# Altium PCB Rev1.PcbDoc
Units mil, origin at the board's own origin, x right, y up, seen from the top; angles counter-clockwise.
Board outline 3765.13 x 1835.48 mil, 2 copper layers (Top Layer, Bottom Layer); 37 components, 36 nets, 211 pads, 76 vias.
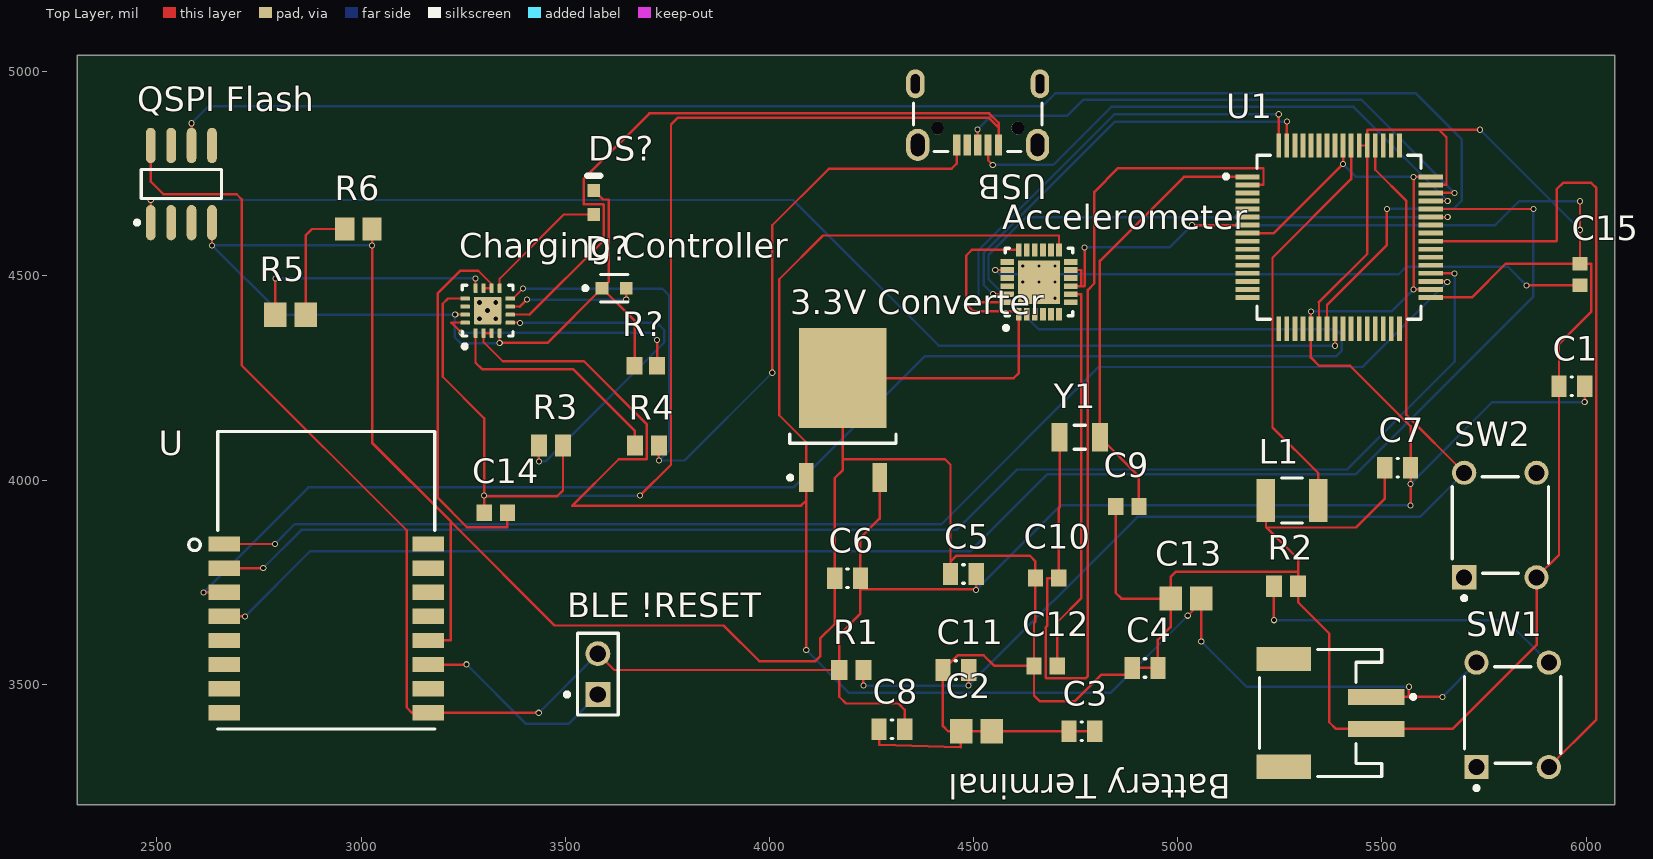
[diagram p0: Top Layer view]
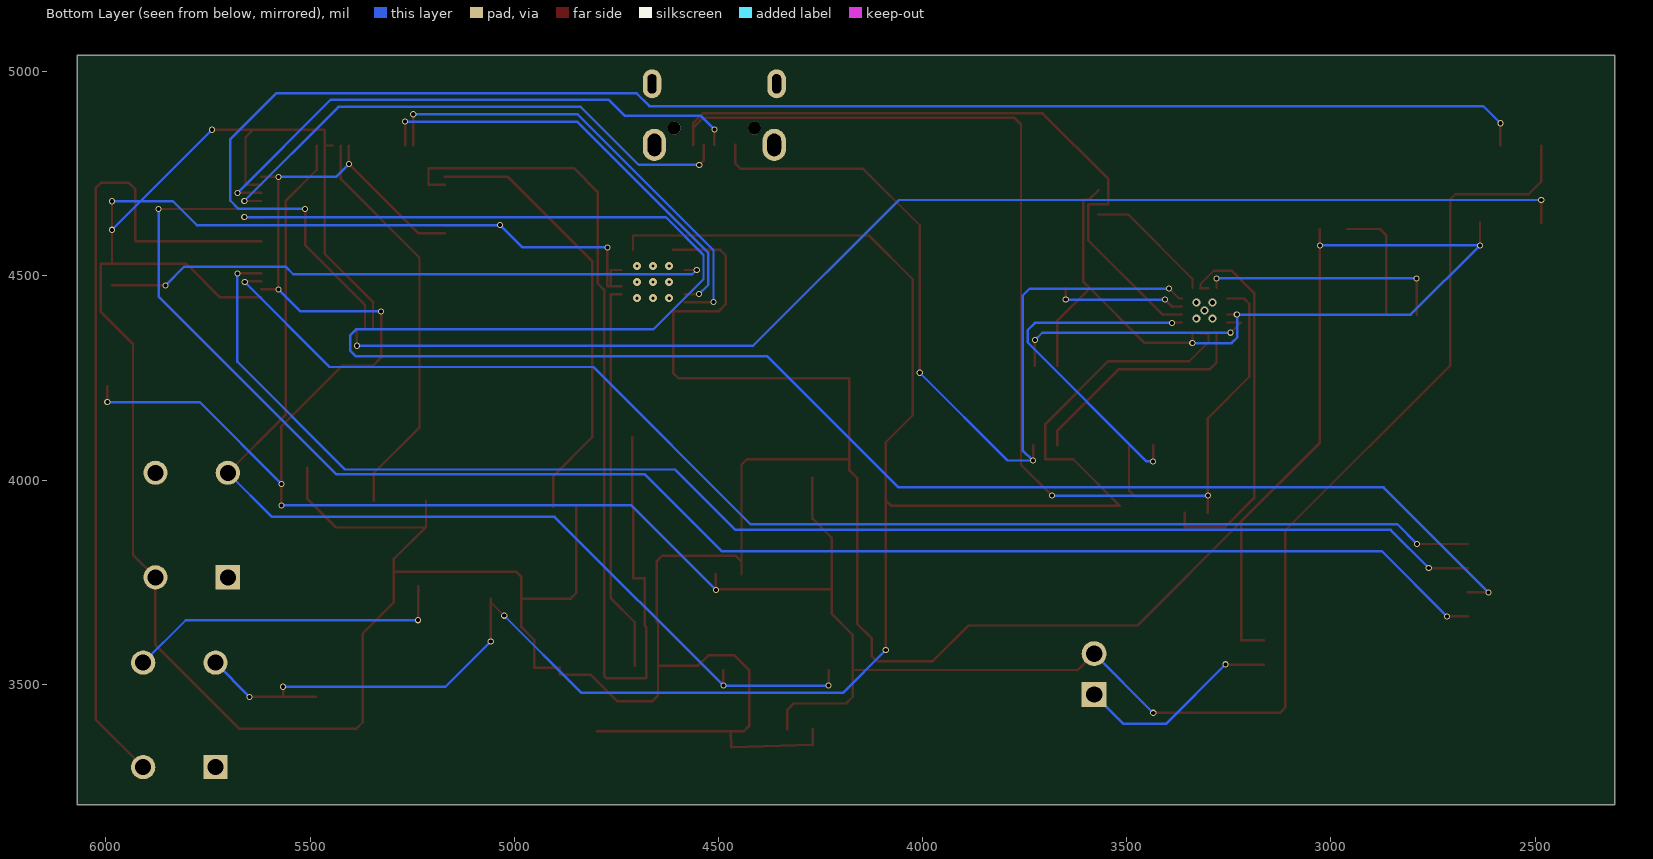
[diagram p1: Bottom Layer view, seen from below]

## Layer stack, top to bottom
Top Solder: solder mask 0.4, Solder Resist, Dk 3.5
Top Layer: signal copper 1.4
Dielectric 1: dielectric 12.6, FR-4, Dk 4.8
Bottom Layer: signal copper 1.4
Bottom Solder: solder mask 0.4, Solder Resist, Dk 3.5

## Board outline
2305,3205 6070.13,3205 6070.13,5040.48 2305,5040.48

## Design rules (kind name [scope] priority, off if disabled: settings)
Clearance [All] p1: gap=6 ignorepadtopadclearanceinfootprint=TRUE except(0: Arc-Hole Track-Hole SMDPad-Hole THPad-Hole Via-Hole Fill-Hole Poly-Hole Region-Hole Text-Hole)
PolygonConnect [All] p1: connectstyle=Relief reliefconductorwidth=10 reliefentries=4 polygonreliefangle="90 Angle" airgapwidth=10
RoomDefinition U_SdpSchemRev1 [InComponentClass('U_SdpSchemRev1')] p1: confinementstyle=ConfineIn formatcopy=TRUE lockcomponents=FALSE outline 0,0 2000,0 2000,1000 0,1000
RoomDefinition Sheet1 [InComponentClass('Sheet1')] p2: confinementstyle=ConfineIn formatcopy=TRUE lockcomponents=FALSE outline 0,0 2000,0 2000,1000 0,1000
RoutingVias [All] p1: holewidth=10 width=15 viastyle="Through Hole" minholewidth=10 minwidth=15 maxholewidth=28 maxwidth=50
SMDNeckDown [All] p1: percent=50.000
SolderMaskExpansion [All] p1: expansion=4 istentingtop=FALSE
Width [All] p1: maxlimit=6 minlimit=6 preferedwidth=6 minimp=50.000000 maximp=50.000000 favimp=50.000000
30 further rules are at their usual default settings.

## Classes and differential pairs
component class Sheet1: "BLE !RESET" "QSPI Flash" U
component class U_SdpSchemRev1: "3.3V Converter" Accelerometer "Battery Terminal" C1 C2 C3 C4 C5 C6 C7 C8 C9 C10 C11 C12 C13 C14 C15 "Charging Controller" D? DS? L1 R1 R2 R3 R4 R5 R6 R? SW1 SW2 U1 USB Y1

## Components (designator, comment, footprint, x,y, rotation, side; value= is the part's Value field where it differs from the comment)
"3.3V Converter" "KF33BDT-TR" TO-252_L 4180,4171.26 r90 top
Accelerometer "MPU6050" INSE-QFN-24_V 4660,4485 r90 top
"Battery Terminal" "S2B-PH-SM4-TB(LF)(SN)" "JST- S2B-PH-SM4-TB(LF)(SN)-2_V" 5350,3430 r270 top
"BLE !RESET" "TSW-102-07-S-S" SMTC-TSW-102-07-S-S 3580,3525 r90 top
C1 "CAP 1uF 50V 0805(2012)" CAPC0805(2012)145_L 5965,4230 r0 top value=1uF
C2 "GRM21BR61E106KA73L" CAPC2013X135X45ML10T25 4507.4,3385 r0 top
C3 "" CAPC0805(2012)145_L 4765,3385 r0 top value=1uF
C4 "CAP 1uF 50V 0805(2012)" CAPC0805(2012)145_L 4920,3540 r0 top value=1uF
C5 "" CAPC0805(2012)145_L 4475,3770 r0 top value=1uF
C6 "" CAPC0805(2012)145_L 4191.5,3760 r0 top value=1uF
C7 "" CAPC0805(2012)145_L 5538.5,4030 r0 top value=1uF
C8 "CAP 1uF 50V 0805(2012)" CAPC0805(2012)145_L 4300,3390 r0 top value=1uF
C9 "GRM1885C1H220JA01D" CAPC1608X90X35ML10T15 4876.46,3935 r0 top
C10 "GRM1885C1H220JA01D" CAPC1608X90X35ML10T15 4680,3760 r0 top
C11 "CAP 1uF 50V 0805(2012)" CAPC0805(2012)145_L 4456.5,3535 r0 top value=1uF
C12 "GRM188R71H103KA01D" CAPC1608X90X35ML10T15 4676.46,3545 r0 top
C13 "GRM21BR61E106KA73L" CAPC2013X135X45ML10T25 5020,3710 r0 top
C14 "GRM188R60J475KE19D" CAPC1608X90X35ML10T15 3330,3920 r0 top
C15 "GRM188R71H222KA01D" CAPC1608X90X35NL10T15 5985,4503.43 r90 top
"Charging Controller" "BQ24075RGTT" RGT0016C_V 3310,4415 r90 top
D? "LTST-C190GKT" FP-LTST-C190GKT-MFG 3620,4470 r0 top
DS? "HSMS-C190" AVAG-HSMX-C190_V 3570,4680 r90 top
L1 "B82422A1103K100" TDK-B82422A1103K100_V 5280,3950 r0 top
"QSPI Flash" "GD25Q16" MICT-MN-8_N 2560,4725 r90 top
R1 "ERA-6AEB103V" RESC2013X60X40LL20T25_A 4200.47,3535 r0 top
R2 "ERA6AEB331V" RESC2013X60X40LL20T25 5265,3740 r0 top
R3 "ERA6AEB2873V" RESC2013X60X40LL20T25 3465,4085 r0 top
R4 "ERA-6AEB103V" RESC2013X60X40LL20T25_A 3700,4085 r0 top
R5 "ERA6AEB472V" RESC2013X60X40ML20T25 2827.6,4405 r0 top
R6 "ERA6AEB332V" RESC2013X60X40NL20T25 2993.46,4615 r0 top
R? "ERA3AEB8451V" RESC1608X55X30ML20T20 3697.56,4280 r0 top
SW1 "PTS645SM43SMTR92LFS" ITT-PTS645S-4_V 5820,3425 r90 top
SW2 "PTS645SM43SMTR92LFS" ITT-PTS645S-4_V 5790,3890 r90 top
U "317030001" XCVR_317030001 2915,3755 r0 top
U1 "ATSAMD51J19" FP-C04-085-MFG 5395,4595 r0 top
USB "629105150521" 629105150521 4510,4935 r180 top
Y1 "ABS07-120-32.768KHZ-T" ABRA-ABS07_A_V 4760,4105 r0 top

## Footprints (in the part's own frame and the unit in brackets; to place one, negate y for a bottom-side part, rotate by r counter-clockwise, add the part's x,y. Pads: shape width x height; smd on the part's side, far side on the other; paste and mask are expansions set on the pad)
629105150521 [mm] "Micro USB 2.0 SMT Type B Horizontal 5 Contacts High Current"
  rect 0.45x1.3 smd: 1(-1.3,2.9) 2(-0.65,2.9) 3(0,2.9) 4(0.65,2.9) 5(1.3,2.9)
  round 0.8 hole 0.8 unplated: MH1(-2.5,1.85) MH2(2.5,1.85)
  oval 1.15x1.8 hole 0.55 slot 1.2 at 90 deg: Shell(-3.875,-0.9) Shell(3.875,-0.9)
  oval 1.45x2 hole 0.85 slot 1.4 at 90 deg: Shell(-3.725,2.9) Shell(3.725,2.9)
  silkscreen extent -4,0.3 4,3.3, body extent -4,-3.3 4,3.3, height 2.75
ABRA-ABS07_A_V [mm] "SMD, 2-Leads, Body 3.2x1.5mm"
  rect 1x1.8 smd: 1(-1.25,0) 2(1.25,0)
  silkscreen extent -0.35,-0.75 0.35,0.75, body extent -1.6,-0.75 1.6,0.75, height 0.9
AVAG-HSMX-C190_V [mm] "SMD, 2-Leads, Body 1.6x0.8mm, Height 0.9mm"
  rect 0.8x0.8 smd: 1(-0.75,0) 2(0.75,0)
  silkscreen extent 1.65,-0.4 1.65,0.4, body extent -0.8,-0.4 0.8,0.4, height 0.9
CAPC0805(2012)145_L [mm] "Chip Capacitor, Body 2.0x1.2mm, Height 1.45mm, IPC High Density"
  rect 0.95x1.35 smd: 1(-0.8,0) 2(0.8,0)
  silkscreen extent -0.05,-0.58 0.05,0.58, body extent -1.1,-0.72 1.1,0.72, height 1.45
CAPC1608X90X35ML10T15 [mm] "Chip Capacitor, 2-Leads, Body 1.7x0.9mm, IPC Low Density"
  rect 0.95x1.05 smd: 1(-0.725,0) 2(0.725,0)
  body extent -0.85,-0.45 0.85,0.45, height 0.9
CAPC1608X90X35NL10T15 [mm] "Chip Capacitor, 2-Leads, Body 1.7x0.9mm, IPC Medium Density"
  rect 0.85x0.95 smd: 1(-0.675,0) 2(0.675,0)
  body extent -0.85,-0.45 0.85,0.45, height 0.9
CAPC2013X135X45ML10T25 [mm] "Chip Capacitor, 2-Leads, Body 2.00x1.25mm, IPC Low Density"
  rect 1.4x1.5 smd: 1(-0.95,0) 2(0.95,0)
  body extent -1.05,-0.67 1.05,0.67, height 1.35
FP-C04-085-MFG [mm]
  rect 1.5x0.3 smd paste+0 mask+0: 1(-5.7,3.75) 2(-5.7,3.25) 3(-5.7,2.75) 4(-5.7,2.25) 5(-5.7,1.75) 6(-5.7,1.25) 7(-5.7,0.75) 8(-5.7,0.25) 9(-5.7,-0.25) 10(-5.7,-0.75) 11(-5.7,-1.25) 12(-5.7,-1.75) 13(-5.7,-2.25) 14(-5.7,-2.75) 15(-5.7,-3.25) 16(-5.7,-3.75) 33(5.7,-3.75) 34(5.7,-3.25) 35(5.7,-2.75) 36(5.7,-2.25) 37(5.7,-1.75) 38(5.7,-1.25) 39(5.7,-0.75) 40(5.7,-0.25) 41(5.7,0.25) 42(5.7,0.75) 43(5.7,1.25) 44(5.7,1.75) 45(5.7,2.25) 46(5.7,2.75) 47(5.7,3.25) 48(5.7,3.75)
  rect 0.3x1.5 smd paste+0 mask+0: 17(-3.75,-5.7) 18(-3.25,-5.7) 19(-2.75,-5.7) 20(-2.25,-5.7) 21(-1.75,-5.7) 22(-1.25,-5.7) 23(-0.75,-5.7) 24(-0.25,-5.7) 25(0.25,-5.7) 26(0.75,-5.7) 27(1.25,-5.7) 28(1.75,-5.7) 29(2.25,-5.7) 30(2.75,-5.7) 31(3.25,-5.7) 32(3.75,-5.7) 49(3.75,5.7) 50(3.25,5.7) 51(2.75,5.7) 52(2.25,5.7) 53(1.75,5.7) 54(1.25,5.7) 55(0.75,5.7) 56(0.25,5.7) 57(-0.25,5.7) 58(-0.75,5.7) 59(-1.25,5.7) 60(-1.75,5.7) 61(-2.25,5.7) 62(-2.75,5.7) 63(-3.25,5.7) 64(-3.75,5.7)
  silkscreen extent -7.15,-5.1 5.1,5.1, body extent -6.55,-6.55 6.55,6.55, height 0.25
FP-LTST-C190GKT-MFG [mm]
  rect 0.8x0.8 smd paste+0 mask+0: 1(-0.75,0) 2(0.75,0)
  silkscreen extent -1.92,-0.85 0.85,0.85, body extent -1.25,-0.55 1.25,0.55, height 0.25
INSE-QFN-24_V [mm] "QFN, 24-Leads, Body 4.00x4.00mm, Pitch 0.50mm, Thermal Pad 2.7x2.6mm"
  rect 0.8x0.35 smd: 1(-2,1.25) 2(-2,0.75) 3(-2,0.25) 4(-2,-0.25) 5(-2,-0.75) 6(-2,-1.25) 13(2,-1.25) 14(2,-0.75) 15(2,-0.25) 16(2,0.25) 17(2,0.75) 18(2,1.25)
  rect 0.35x0.85 smd: 7(-1.25,-1.975) 8(-0.75,-1.975) 9(-0.25,-1.975) 10(0.25,-1.975) 11(0.75,-1.975) 12(1.25,-1.975) 19(1.25,1.975) 20(0.75,1.975) 21(0.25,1.975) 22(-0.25,1.975) 23(-0.75,1.975) 24(-1.25,1.975)
  rect 2.7x2.6 smd: 25(0,0)
  silkscreen extent -2.97,-2.1 2.1,2.17, body extent -2,-2 2,2, height 0.95
ITT-PTS645S-4_V [mm] "TH, 4-Leads, Body 6x6mm"
  rect 1.5x1.5 hole 1: 1(-3.25,2.25)
  round 1.5 hole 1: 2(3.25,2.25) 3(-3.25,-2.25) 4(3.25,-2.25)
  silkscreen extent -4.67,-3 3,3, body extent -3,-3 3,3, height 4.4
"JST- S2B-PH-SM4-TB(LF)(SN)-2_V" [mm] "SMD, 2-Leads, Body 7.9x7.6mm, Pitch 2mm"
  rect 1x3.5 smd: 1(-1,3.45) 2(1,3.45)
  rect 1.5x3.4 smd: MP1(-3.35,-2.3) MP2(3.35,-2.3)
  silkscreen extent -3.95,-3.8 3.95,5.88, body extent -3.95,-3.8 3.95,4.8, height 5.6
MICT-MN-8_N [mm] "SOIC, 8-Leads, Body 5x4mm, Pitch 1.27mm, IPC Medium Density"
  oval 2.2x0.6 smd: 1(-2.4,1.905) 2(-2.4,0.635) 3(-2.4,-0.635) 4(-2.4,-1.905) 5(2.4,-1.905) 6(2.4,-0.635) 7(2.4,0.635) 8(2.4,1.905)
  silkscreen extent -2.52,-2.5 0.9,2.88, body extent -2,-2.5 2,2.5, height 0.1
RESC1608X55X30ML20T20 [mm] "Chip Resistor, 2-Leads, Body 1.60x0.80mm, IPC Low Density"
  rect 1x1.1 smd: 1(-0.7,0) 2(0.7,0)
  body extent -0.9,-0.5 0.9,0.5, height 0.55
RESC2013X60X40LL20T25 [mm] "Chip Resistor, 2-Leads, Body 2.00x1.25mm, IPC High Density"
  rect 1x1.35 smd: 1(-0.75,0) 2(0.75,0)
  body extent -1.1,-0.72 1.1,0.72, height 0.6
RESC2013X60X40LL20T25_A [mm] "Chip Resistor, 2-Leads, Body 2.20x1.35mm, IPC High Density"
  rect 1x1.25 smd: 1(-0.75,0) 2(0.75,0)
  body extent -1.1,-0.67 1.1,0.67, height 0.6
RESC2013X60X40ML20T25 [mm] "Chip Resistor, 2-Leads, Body 2.00x1.25mm, IPC Low Density"
  rect 1.4x1.55 smd: 1(-0.95,0) 2(0.95,0)
  body extent -1.1,-0.72 1.1,0.72, height 0.6
RESC2013X60X40NL20T25 [mm] "Chip Resistor, 2-Leads, Body 2.00x1.25mm, IPC Medium Density"
  rect 1.2x1.45 smd: 1(-0.85,0) 2(0.85,0)
  body extent -1.1,-0.72 1.1,0.72, height 0.6
RGT0016C_V [mm] "QFN, 16-Leads, Body 3x3mm, Pitch 0.5mm, Thermal Pad 1.65x1.65mm"
  rrect40% 0.6x0.25 smd: 1(-1.4,0.75) 2(-1.4,0.25) 3(-1.4,-0.25) 4(-1.4,-0.75) 9(1.4,-0.75) 10(1.4,-0.25) 11(1.4,0.25) 12(1.4,0.75)
  rrect40% 0.25x0.6 smd: 5(-0.75,-1.4) 6(-0.25,-1.4) 7(0.25,-1.4) 8(0.75,-1.4) 13(0.75,1.4) 14(0.25,1.4) 15(-0.25,1.4) 16(-0.75,1.4)
  rrect6% 1.7x1.7 smd paste-0.85: 17(0,0)
  rrect6% 1.55x1.55 on Top Paste: 17(0,0)
  silkscreen extent -2.35,-1.58 1.58,1.58, body extent -1.5,-1.5 1.5,1.5, height 1
SMTC-TSW-102-07-S-S [mm] "Header, 2-Leads, Body 5.08x2.54mm, Pitch 2.54mm"
  rect 1.55x1.55 hole 1.02: 1(-1.27,0)
  round 1.55 hole 1.02: 2(1.27,0)
  silkscreen extent -2.54,-1.27 2.54,2.04, body extent -2.54,-1.27 2.67,1.27, height 8.38
TDK-B82422A1103K100_V [mm] "Molded Inductor, 2-Leads, Body 3.5x2.8mm"
  rect 1.15x2.7 smd: 1(-1.625,0) 2(1.625,0)
  silkscreen extent -0.65,-1.4 0.65,1.4, body extent -1.97,-1.4 1.97,1.4, height 2.1
TO-252_L [mm] "D-PAK, 4-Leads, Body 6.1x6.5mm, Pitch 2.28mm, Lead Span 9.7mm, IPC High Density"
  rect 1.8x0.9 smd: 1(-4.2,2.28) 3(-4.2,-2.28)
  rect 6.2x5.45 smd: 4(2,0)
  silkscreen extent -4.32,-3.3 -1.5,3.4, body extent -2.05,-3.3 4.15,3.3, height 2.4
XCVR_317030001 [mm]
  rect 1.95x0.95 smd: 1(-6.35,2.25) 2(-6.35,0.75) 3(-6.35,-0.75) 4(-6.35,-2.25) 5(-6.35,-3.75) 6(-6.35,-5.25) 7(-6.35,-6.75) 8(-6.35,-8.25) 9(6.35,-8.25) 10(6.35,-6.75) 11(6.35,-5.25) 12(6.35,-3.75) 13(6.35,-2.25) 14(6.35,-0.75) 15(6.35,0.75) 16(6.35,2.25)
  silkscreen extent -8.56,-9.25 6.75,9.25

## Part data
"3.3V Converter": library part CMP-0244-00072-1, "Very Low Drop Voltage Regulators with Inhibit, 3.3V, 3-Pin DPAK, Tape and Reel", ComponentLink1Description="Manufacturer URL", ComponentLink1URL=http://www.st.com, ComponentLink2Description=Datasheet, ComponentLink2URL=http://www.st.com/internet/com/TECHNICAL_RESOURCES/TECHNICAL_LITERATURE/DATASHEET/CD00000970.pdf, DatasheetVersion=21/02/2008, PackageDescription="3-Pin Transistor Outline Package 2.28 mm Pitch, 9.7 mm Lead Span (DPAK)", PackageReference=TO-252, PackageVersion=2011
Accelerometer: library part CMP-1753-00002-1, "3-Axis Gyroscope, 3-Axis Accelerometer / , 2.375 to 3.46 V, -40 to 105 degC, 24-Pin QFN, RoHS, Tape and Reel", Case Code (Imperial)=0603, Case Code (Metric)=1608, Max Operating Temperature=155degC, Min Operating Temperature=-55degC, Package Quantity=5000, Power Rating="100 mW", Resistance="5.6 kohm", Tolerance=1%, Voltage Rating="75 V", Case/Package=0603, ComponentLink1Description="Manufacturer URL", ComponentLink1URL=http://www.invensense.com/, ComponentLink2Description=Datasheet, ComponentLink2URL=https://datasheet.ciiva.com/1513/1788002-1513632.pdf, DatasheetVersion="Rev. 3.4, 08/2013", Height="0.45 mm", Length="1.6 mm", Mount="Surface Mount", PackageDescription="24-Pin Quad Flat No-lead Package, Body 4 x 4 mm, Pitch 0.5 mm", PackageReference=QFN-24, Packaging="Tape and Reel", Pins=2, Radiation Hardening=No, REACH SVHC=Yes, RoHSCompliant=True, Width="0.8 mm"
"Battery Terminal": library part CMP-1755-00001-1, "Male Header, Pitch 2 mm, 1 x 2 Position, Height 5.5 mm, -25 to 85 degC, RoHS, Tape and Reel", Colour=Black, Current Rating="3 A", Max Operating Temperature=105degC, Min Operating Temperature=-65degC, Package Quantity=100, ComponentLink1Description="Manufacturer URL", ComponentLink1URL=http://www.jst.com/home2.html, ComponentLink2Description=Datasheet, ComponentLink2URL=http://www.jst-mfg.com/product/pdf/eng/ePH.pdf, Contact Finish=Lead, Contact Material=Bronze, Contact Plating=Tin, DatasheetVersion=Dec-12, Height="8.13 mm", Lead Pitch="0.1 inch", Length="101.19 mm", Mount="Through Hole", PackageDescription="Male Header, Pitch 2 mm, 1 x 2 Position, Height 5.5 mm", PackageReference=S2B-PH-SM4-TB(LF)(SN)-2, Packaging=Bulk, Pins=40, Radiation Hardening=No, RoHSCompliant=True, Width="2.34 mm"
"BLE !RESET": library part CMP-1681-00004-4, "Male Header, Pitch 2.54 mm, 1 x 2 Position, Height 8.38 mm, Tail Length 2.54 mm, -55 to 125 degC, RoHS, Bulk", Colour=Black, Manufacturer=Samtec, Max Operating Temperature="125 degC", Min Operating Temperature="-55 degC", Package Quantity=1, ComponentLink1Description="Manufacturer URL", ComponentLink1URL=http://www.samtec.com/, ComponentLink2Description=Datasheet, ComponentLink2URL=http://suddendocs.samtec.com/catalog_english/tsw_th.pdf, Contact Finish=Gold, Contact Material=Bronze, Contact Plating=Gold, DatasheetVersion=12/2015, Height="8.38 mm", Lead Pitch="0.1 inch", Length="5.08 mm", Mount="Through Hole", Mounting Technology="Through Hole", PackageDescription="Male Header, Pitch 2.54 mm, 1 x 2 Position, Height 8.38 mm, Tail Length 2.54 mm", PackageReference=TSW-102-07-S-S, Packaging=Bulk, Pins=2, REACH SVHC="No SVHC", RoHSCompliant=true, Rows=1
C1 C3 C4 C5 C6 C7 C8 C11: library part CMP-1036-04761-1, "CAP 1uF 50V ±10% 0805 (2012 Metric) Thickness 1.45mm SMD", Case-EIA=0805, Case-Metric=2012, Rated Voltage="50 V", Tolerance=Â±10%, Max Thickness="1.45 mm", Technology=SMT
C2 C13: library part CMP-2007-03541-1, Manufacturer=Murata, Part Number=GRM21BR61E106KA73L
C9 C10: library part CMP-2000-04945-1, "Chip Capacitor, 22 pF, +/- 5%, 50 V, -55 to 125 degC, 0603 (1608 Metric), RoHS, Tape and Reel", Capacitance=22pF, Case Size/Dimension=0603, Dielectric=C0G, Manufacturer=Murata, Package Description="2-Pin Surface Mount Device, Body 1.6 x 0.8 mm", Package Reference=603, Rated Voltage=50V, Tolerance (%)=±5%, Datasheet URL=https://datasheet.ciiva.com/11786/0900766b807a1cab-11786398.pdf, Datasheet Version=Jul-06, Manufacturer URL=http://www.murata.com/
C12: library part CMP-2100-03642-1, "Chip Capacitor, 10 nF, +/- 10%, 50 V, -55 to 125 degC, 0603 (1608 Metric), RoHS, Tape and Reel", Capacitance=10nF, Case Code (Imperial)=0603, Case Code (Metric)=1608, Dielectric=X7R, Dielectric Material=Ceramic, Insulation Resistance=10GR, Manufacturer=Murata, Max Operating Temperature=125degC, Min Operating Temperature=-55degC, Package Description="2-Pin Surface Mount Device, Body 1.6 x 0.8 mm", Package Quantity=1, Tolerance=10%, Voltage=50V, Case/Package=0603, Datasheet URL=http://search.murata.co.jp/Ceramy/image/img/A01X/G101/ENG/GRM188R71H103KA01-01.pdf, Datasheet Version=42401.0, Depth=0.8mm, Height=0.8mm, Lead Free=LeadFree, Length=1.6mm, Manufacturer URL=http://www.murata.com/, Material=Ceramic, Mount=SurfaceMount, Number of Pins=2, Package Reference=0603, Packaging=TapeandReel, REACH SVHC=Unknown, RoHSCompliant=True, Termination=SMD/SMT, Thickness=0.035inch, Voltage Rating=50V, Voltage Rating (DC)=50V, Width=0.031inch
C14: library part CMP-2006-02799-2, "Chip Capacitor, 4.7 uF, +/- 10%, 6.3 V, -55 to 85 degC, 0603 (1608 Metric), RoHS, Tape and Reel", Capacitance="4.7 uF", Case Code (Imperial)=0603, Case Code (Metric)=1608, Max Operating Temperature="85 degC", Min Operating Temperature="-55 degC", Package Quantity=4000, Tolerance=10%, Type (Capacitors)=X5R, Voltage Rating="6.3 V", Voltage Rating (DC)="3 V", Case/Package=0603, ComponentLink1Description="Manufacturer URL", ComponentLink1URL=http://www.murata.com/, ComponentLink2Description=Datasheet, ComponentLink2URL=http://psearch.en.murata.com/capacitor/product/GRM188R60J475KE19%23.pdf, DatasheetVersion=08/2016, Height="0.8 mm", Length="1.6 mm", Mount="Surface Mount", Mounting Technology="Surface Mount", PackageDescription="2-Pin Surface Mount Device, Body 1.6 x 0.8 mm", Packaging="Tape and Reel", PartNumber=GRM188R60J475KE19D, Radiation Hardening=No, REACH SVHC="No SVHC", RoHSCompliant=true, Width="0.8 mm"
C15: library part CMP-1662-00006-4, "Chip Capacitor, 2.2 nF, +/- 10%, 50 V, -55 to 125 degC, 0603 (1608 Metric), RoHS, Tape and Reel", Manufacturer=Murata, Max Operating Temperature="125 degC", Min Operating Temperature="-55 degC", Package Quantity=4000, Voltage Rating="50 V", ComponentLink1Description="Manufacturer URL", ComponentLink1URL=http://www.murata.com/, ComponentLink2Description=Datasheet, ComponentLink2URL=http://search.murata.co.jp/Ceramy/image/img/A01X/G101/ENG/GRM188R71H222KA01-01.pdf, DatasheetVersion=02/2016, Height="0.8 mm", Lead Pitch="4 mm", Length="1.6 mm", Mount="Surface Mount", Mounting Technology="Surface Mount", PackageDescription="2-Pin Surface Mount Device, Body 1.6 x 0.8 mm", PackageReference=0603, Packaging="Tape and Reel", Pins=2, REACH SVHC="No SVHC", RoHSCompliant=true
"Charging Controller": library part CMP-0321-00236-2, "USB-Friendly Li-Ion Battery Charger and Power-Path Management IC, Vout 5.5 V, 4.3 V, -40 to 85 degC, 16-pin QFN (RGT), Green (RoHS & no Sb/Br)", Manufacturer="Texas Instruments", Over Voltage Protection=N, Code_JEDEC=MO-220, ComponentLink1Description=Datasheet, ComponentLink1URL=http://www.ti.com/general/docs/lit/getliterature.tsp?genericPartNumber=BQ24075&fileType=pdf, DatasheetVersion=SLUS810G, Eco-Plan="Green (RoHS & no Sb/Br)", Lead Acid=N, Li-Ion=N, Li-Polymer=N, Mounting Technology="Surface Mount", NiCd=N, NiMH=N, PackageDescription="16-Pin Plastic Quad Flat No-Lead, 3 x 3 mm Body, 0.5 mm Pitch, 1.7 x 1.7 mm Exposed Pad", PackageReference=RGT0016C, PackageVersion="revH, Oct-2011", PartNumber=BQ24075RGTT, SubFamily="Battery Charge Management", Vin(Min)(V)=4.3
D?: library part CMP-22017-000018-1, "LED GREEN CLEAR CHIP SMD", Case Code (Imperial)=0603, Case Code (Metric)=1608, Color=Green, Forward Current=30mA, Forward Voltage=2.1V, Lens Color=Colorless, Max Operating Temperature=85°C, Min Operating Temperature=-55°C, Package Quantity=1, Power Dissipation=100mW, Reverse Voltage=5V, Test Current=10mA, Voltage=2V, Case/Package=0603, Depth=0.8mm, Dominant Wavelength=569nm, Height=0.8mm, Illumination Color=Green, Lead Free="Lead Free", Length=1.6mm, Lens Style=Clear, Lens Transparency=Clear, Luminous Intensity=6mcd, Mount="Surface Mount", Number of Elements=1, Number of LEDs=1, Number of Pins=2, Packaging="Tape and Reel", Power Rating=100mW, Radiation Hardening=No, Viewing Angle=130°, Wavelength=565nm, Width=0.8mm
DS?: library part CMP-2000-06427-1, "LED Uni-Color Red, 52 mW, 20 mA, -40 to 85 degC, 2-Pin SMD, RoHS, Tape and Reel", Emitting Color=Red, Forward Current=25mA, Forward Voltage=2.6V, Manufacturer=Avago, Operating Temp Range=-40Cto85C, Operating Temperature Classification=Industrial, Package Description="2-Pin Surface Mount Device, Body 1.6 x 0.8 mm, Height 0.9 mm", Package Reference=HSMX-C190, Package Type=ChipLed, Power Dissipation=52W, Reverse Voltage=5V, Test Current (It)=20mA, Chip Material=GaP, Datasheet URL=http://docs.avagotech.com/docs/AV02-0551EN, Datasheet Version=03/2012, DELETED=Compliant, Dominant Wave Length=626nm, High Brightness=No, Lens Dimensions=1x0.8x0.5mm, Lens Type=ColorlessDiffused, Lum Intensity=10mcd, Luminous Intensity=10mcd, Main Category=ChipLED, Manufacturer URL=http://www.avagotech.com/, Mounting=SurfaceMount, Mounting Technology=SurfaceMount, Number of  Elements=1, Packaging=TapeandReel, Peak Wavelength=630nm, Pin Count=2, Product Depth (mm)=0.8mm, Product Height (mm)=0.8mm, Product Length (mm)=1.6mm, Rad Hardened=No, Shape Type=Rectangular, Type=Uni-Color, Viewing Angle=170deg
L1: library part CMP-2000-05912-1, "Wirewound Inductor, 10 uF, +/- 10%, 180 mA, -55 to 125 degC, 2-Pin SMD, RoHS, Tape and Reel", Current - Saturation=-, Current Rating=180mA, DC Resistance (DCR)=1.6OhmMax, Frequency - Self Resonant=25MHz, Frequency - Test=1MHz, Inductance=10µH, Manufacturer=EPCOS-(TDK), Package / Case=1210(3225Metric), Package Description="2-Pin Surface Mount Device, Body 3.2 x 2.5 mm", Q @ Freq=27@2.52MHz, Ratings=AEC-Q200, Tolerance=±10%, Category=Inductors,Coils,Chokes, Datasheet URL=https://en.tdk.eu/inf/30/db/ind_2008/b82422a_100.pdf, Datasheet Version=10/2012, Family=FixedInductors, Height - Seated (Max)="0.083\"(2.10mm)", Manufacturer URL=http://www.tdk.com/, Material - Core=Ferrite, Mounting Technology=SurfaceMount, Mounting Type=SurfaceMount, Operating Temperature=-, Package Reference=B82422A1103K100, Packaging=CutTape(CT), Series=SIMID, Shielding=Unshielded, Size / Dimension="0.126\"Lx0.098\"W(3.20mmx2.50mm)", Type=Wirewound
"QSPI Flash": library part CMP-0357-00068-1, "1 Mb (x1) Serial NOR Flash Memory with Page Erase, 75 MHz, 2.7 to 3.6 V, 8-pin SO8 Narrow (MN), Tube", Manufacturer=Micron, Package="SO8 Narrow", PartNumber=M45PE10-VMN6P, Voltage=2.7V-3.6V, Applications=Embedded, ComponentLink1Description="Manufacturer URL", ComponentLink1URL=http://www.micron.com/, ComponentLink2Description=Datasheet, ComponentLink2URL=http://www.micron.com/~/media/Documents/Products/Data%20Sheet/NOR%20Flash/Serial%20NOR/M25PE_M45PE/M45PE10.pdf, ComponentLink3Description="Package Specification", ComponentLink3URL=http://www.micron.com/~/media/Documents/Products/Data%20Sheet/NOR%20Flash/Serial%20NOR/M25P/M25P05A.pdf, DatasheetVersion="Rev. 8", Density=1Mb, Mounting Technology="Surface Mount", PackageDescription="8-Pin SO Narrow, 3.9 X 4.9 mm, Pitch 1.27 mm", PackageReference=MICT-MN-8, PackageVersion="Rev 11", Part Family=M45PE, Part Status=Production, RoHS=Yes, Speed="75 MHz", Type="Page Erase", Width=x1
R1 R4: library part CMP-2000-06228-1, "Metal Film Chip Resistor, High Reliability Type, 0.125 W, +/- 0.1%, -55 to 155 degC, 0805 (2012 Metric), RoHS, Tape and Reel", Case Code - in=0805, Case Code - mm=2012, Manufacturer=Panasonic, Operating Temperature Range=-55Cto+155C, Package / Case=0805(2012metric), Package Description="2-Pin Surface Mount Device, Body 2 x 1.25 mm", Power Rating=125mW(1/8W), Resistance=10kOhms, Temperature Coefficient=25PPM/C, Tolerance=0.1%, Voltage Rating=100V, Brand=Panasonic, Datasheet URL=https://industrial.panasonic.com/cdbs/www-data/pdf/RDM0000/AOA0000C307.pdf, Datasheet Version=02/2016, Factory Pack Quantity=5000, Height=0.5mm, Length=2mm, Manufacturer URL=http://www.panasonic.com/, Mounting Technology=SurfaceMount, Package Reference=0805, Packaging=Reel, Product=ThinFilmResistorsSMD, Product Category=ThinFilmResistors-SMD, RoHS=Details, Series=ERA-6A, Termination Style=SMD/SMT, Type=MetalFilmChipResistors, Width=1.25mm
R2: library part CMP-2001-00628-1, Manufacturer=Panasonic, Part Number=ERA6AEB331V
R3: library part CMP-2001-00791-1, Manufacturer=Panasonic, Part Number=ERA6AEB2873V
R5: library part CMP-2001-00644-1, Manufacturer=Panasonic, Part Number=ERA6AEB472V
R6: library part CMP-2001-00629-1, Manufacturer=Panasonic, Part Number=ERA6AEB332V
R?: library part CMP-2000-00133-1, Manufacturer=Panasonic, Part Number=ERA3AEB8451V
SW1 SW2: library part CMP-2000-05160-1, "6 mm Tact Switche, SPST, NO, -20 to 60 degC, 4-Pin SMT, RoHS, Tape and Reel", Manufacturer="ITT Cannon", Datasheet URL=https://datasheet.ciiva.com/29903/getdatasheetpartid-786341-29903846.pdf, Datasheet Version=Feb-14, Manufacturer URL=http://www.ittcannon.com/
U: "Bluetooth Bluetooth v4.0 Transceiver Module 2.4GHz Integrated, Trace Surface Mount", Package="Module Seeed Technology", Digi-Key_Part_Number=1597-1359-ND, Digi-Key_Purchase_URL=https://www.digikey.kr/product-detail/en/seeed-technology-co-ltd/317030001/1597-1359-ND/5487659?utm_source=snapeda&utm_medium=aggregator&utm_campaign=symbol, MF="Seeed Technology", MP=317030001, SnapEDA_Link=https://www.snapeda.com/parts/317030001/Seeed%20Technology%20Co.%2C%20Ltd/view-part/449174/?ref=snap
U1: library part CMP-06276-000034-1, "IC MCU 32BIT 1MB FLASH 64TQFP", Ambient Temperature Range High=+85°C, Ambient Temperature Range Low=-40°C, Frequency=120MHz, Manufacturer=Microchip, Manufacturer Part Number=ATSAMD51J20A-AU, Max Junction Temp=+105°C, Max Supply Voltage=3.63V, Min Supply Voltage=1.71V, Nominal Supply Current=7mA, Package=C04-085, Temperature="-40°C to +85°C", Automotive=Yes, Automotive Grade="Grade 1", Category=IC, ComponentLink2Description=Datasheet, ComponentLink2URL=http://ww1.microchip.com/downloads/en/DeviceDoc/60001507E.pdf, Core Architecture="ARM Cortex-M4F", Data Bus Width=32bits, Device Class L1="Integrated Circuits (ICs)", Device Class L2="Embedded Processors and Controllers", Device Class L3=Microcontrollers, Digikey Description="IC MCU 32BIT 1MB FLASH 64TQFP", Height=1.2mm, Interface=I2C,SPI,USART,USB,LIN,Ethernet,I2S,RS-485,Other, Lead Free=Yes, Memory Size=1MBytes, Memory Type=FLASH, Mouser Description="MCU 32-bit ARM Cortex M4F RISC 1MB Flash 3.3V 64-Pin TQFP Tray", Number Of A/D Converters=2, Number Of Adc Channels=24, Number Of Cores=1, Number Of Ethernet Channels=1, Number Of I2C Channels=6, Number Of I/Os=51, Number Of Pwm Channels=2, Number Of Spi Channels=6, Number Of Timers/Counters=8, Number Of Usb Channels=1, Octopart=https://octopart.com/atsamd51j20a-au-microchip-83497274, Ram Size=256KBytes, RoHS=TRUE, Standoff Height=0.05mm, Temperature Range High=+85°C, Temperature Range Low=-40°C
USB: library part CMP-1502-03252-1, "Micro USB 2.0 Type B Receptacle WR-COM, Horizontal, SMT, with Pegs, High Current at Pin 1 & Pin 5", Contact Resistance=30mOhm, Manufacturer="Wurth Elektronik", Operating Temperature=-40to85degC, Rated Current=3A, Working Voltage=30VAC, Connector Type=MicroUSB2.0TypeB, Datasheet URL=https://katalog.we-online.de/em/datasheet/629105150521.pdf, Gender=Receptacle, Manufacturer URL=http://www.we-online.de, Mounting Technology=SMT, Orientation=Horizontal, Package Reference=629105150521, Packaging=TapeandReel, Part Number=629105150521, Publisher=WurthElektronik
Y1: library part CMP-2000-07587-1, "Tuning Fork Crystal, 32.768 KHz, +/- 20 ppm, -40 to 85 degC, 2-Pin SMD, RoHS, Tape and Reel", Case\/Package=SMD/SMT, ESR (Equivalent Series Resistance)=55KOhm, Frequency=32.768KHz, Frequency Tolerance=20ppm, Load Capacitance=6pF, Manufacturer=Abracon, Max Operating Temperature=85degC, Min Operating Temperature=-40degC, Package Description="2-Pin Surface Mount Device, Body 3.2 x 1.5 mm", Package Quantity=3000, Package Reference=ABS07, Series Resistance=60KOhm, Datasheet URL=http://www.abracon.com/Resonators/ABS07-120-32.768kHz-T.pdf, Datasheet Version=11/2014, Depth=1.5mm, Height=0.035inch, Lead Free=LeadFree, Length=3.2mm, Manufacturer URL=http://www.abracon.com/, Mount=SurfaceMount, Mounting Technology=SurfaceMount, Number of Pins=2, Packaging=TapeandReel, Radiation Hardening=No, REACH SVHC=NoSVHC, RoHSCompliant=True, Termination=SMD/SMT, Tolerance=20ppm, Width=0.061inch

## Via types
v1: diameter 15, hole 10, Top Layer to Bottom Layer, 62 vias
v2: diameter 19.68, hole 7.87, Top Layer to Bottom Layer, 9 vias
v3: diameter 19.68, hole 11.81, Top Layer to Bottom Layer, 5 vias

## Nets (pads, with @x,y where several pads share a name; then routed paths per layer and width w, separated by ;. In a path a pad name is that pad's centre, name@x,y a point inside that pad or via, vN(x,y) a via of type N, cw(c..) or ccw(c..) an arc to the next point about the centre after c; other vN are vias at no path point)
"Net3.3V Converter_1": "3.3V Converter.1" "Battery Terminal.1" "Charging Controller.2" "Charging Controller.3" Accelerometer.13 C13.2 SW1.2 | length 5263.6
  Top Layer w4.92: 3300.16,4359.88 3300.16,4337.5 3346.66,4291
  Top Layer w6: 3300.16,4359.88 3319.84,4359.88 ; 3346.66,4291 3545.59,4291 3700,4136.59 3700,4052 3699,4051 3631,4051 3517.5,3937.5 4077.74,3937.5 4090.24,3950 ; v1(4090.24,3583.76) 4090.24,3950 ; Accelerometer.13 4709.21,4598 4708.21,4599 4131,4599 4024,4492 4024,4159 4090.24,4092.76 4090.24,4005.91 4090.24,3950 ; v1(5024.4,3668) C13.2@5057.4,3701 ; v1(5057.4,3605) C13.2@5057.4,3701 ; C13.2 C13.2@5057.4,3701 ; v1(5566,3494) 5566,3470.37 5485.83,3469.37 v1(5647.84,3469.37)
  Bottom Layer w6: v1(4090.24,3583.76) 4195,3479 4835.4,3479 v1(5024.4,3668) ; v1(5057.4,3605) 5168.4,3494 v1(5566,3494) ; v1(5647.84,3469.37) SW1.2
"Net3.3V Converter_3": "3.3V Converter.3" "BLE !RESET.2" "QSPI Flash.8" C1.2 C5.2 C6.2 C7.2 C8.2 R1.1 U1.8 U1.21 U1.34 U1.48 U1.56 U.9 | length 7529.9
  Top Layer w5.91: U1.8 5235.68,4604.84 v1(5404.84,4774) U1.56 ; 5326.1,4300 U1.21 v1(5326.1,4413) ; U1.34 v1(5577.38,4467.05) v1(5577.38,4742.64) U1.48
  Top Layer w6: 2485,4819.49 2485,4731 2516,4700 2695.5,4700 2708,4687.5 2708,4281 3111.8,3877.2 3111.8,3443.39 3125,3430.2 U.9 v1(3435.2,3430.2) ; 3580,3575 3620,3535 R1.1 ; 4269.76,4005.91 4269.76,3905.77 4222.99,3859 C6.2 4222.99,3732.94 ; C8.2 4331.5,3437.5 4316,3453 4187.5,3453 4170.94,3469.56 R1.1 ; v1(4506,3731) v1@4506,3732.94 ; 5326.1,4300 5346.1,4280 5422,4280 5570,4132 C7.2 v1(5570,3990.92) v1(5570,3938) ; v1(5996.5,4191) C1.2 ; R1.1 4170.94,3621 4222.99,3673.05 4222.99,3732.94 ; 4222.99,3732.94 v1@4506,3732.94 ; v1@4506,3732.94 C5.2 4506.5,3731.5 v1@4506,3732.94
  Bottom Layer w6: v1(3435.2,3430.2) 3580,3575 ; v1(4506,3731) 4713,3938 v1(5570,3938) ; v1(5326.1,4413) 5523.33,4413 v1(5577.38,4467.05) ; v1(5404.84,4774) 5436.2,4742.64 v1(5577.38,4742.64) ; v1(5570,3990.92) 5770.08,4191 v1(5996.5,4191)
"Net3.3V Converter_4": "3.3V Converter.4" "Battery Terminal.2" "Charging Controller.4" "Charging Controller.15" "QSPI Flash.4" Accelerometer.1 Accelerometer.9 Accelerometer.11 Accelerometer.18 C1.1 C2.1 C2.2 C3.1 C3.2 C4.1 C4.2 C5.1 C6.1 C7.1 C8.1 C9.1 C10.1 C11.1 C12.1 C13.1 C15.2 D?.1 DS?.2 L1.1 R2.2 R6.2 R?.1 SW2.3 U1.7 U1.22 U1.33 U1.47 U1.53 U1.54 U.12 | length 15787.1
  Top Layer w4.92: v1(3230.57,4405.16) 3254.88,4405.16 ; v1(3339.53,4335.57) 3339.53,4336 3339.53,4359.88
  Top Layer w5.91: v1(5034.53,4624.53) U1.7 ; U1.22 5345.79,4436 ; 5463.9,4554.11 U1.53 5463.9,4857 5464.9,4858 5639.5,4858 v1(5740,4858) ; U1.33 5720.36,4447.36 ; U1.47 5657,4722.95 5658,4723.95 5658,4839.5
  Top Layer w6: v1(2635,4575) 2635,4630.51 ; R6.2 v1@3026.93,4575.07 ; v1(3027,4575) v1@3026.93,4575.07 ; U.12 3219,3607.36 3220,3608.36 3220,3898 ; v1@3339.53,4336 3456.47,4336 D?.1 ; DS?.2 3592.3,4687.22 3605.52,4687.22 3606.74,4686 3606.74,4486.27 D?.1 ; R?.1 3670,4390.47 D?.1 ; C8.1 4268.5,3352 4469,3345.42 C2.1 ; C5.1 4443.5,3800 ; Accelerometer.18 4610.79,4564 4496,4564 4482,4550 4482,4431 4500,4413 4610.79,4413 Accelerometer.1 4610.79,4262.5 4598.29,4250 4180,4250 4180,4051 ; Accelerometer.9 4763,4475.16 ; Accelerometer.11 4763,4514.53 4764,4513.53 4764,4476.16 4763,4475.16 ; v1(4772,4570) 4772,4476.16 4771,4475.16 4763,4475.16 ; C3.2 C3.1 C2.2 C2.1 ; C9.1 4847.91,3724.09 4862,3710 C13.1 ; L1.1 5216.02,3885 ; 5217.02,3884 5216.02,3885 ; 5345.79,4436 5463.9,4554.11 ; U1.54 U1.53 ; C7.1 5507.01,3955 5436.01,3884 5217.04,3884 ; 5639.5,4858 5658,4839.5 ; 5720.36,4447.36 5803,4530 C15.2 ; v1(5985,4683) v1(5985,4613) C15.2 ; 3026.93,4092.07 3026.93,4575 v1@3026.93,4575.07 ; 3026.93,4092.07 3026.93,4091.07 3220,3898 ; 3026.93,4092.07 3220,3899 3220,3898 ; 3220,3898 3474,3644 3888,3644 3975,3557 4112.5,3557 4125,3569.5 4125,3613 4160,3648 C6.1 4160,4005 4180,4025 4180,4051 ; 4180,4051 4430,4051 4443.5,4037.5 4443.5,3800 ; 4443.5,3800 4458.5,3815 4637.5,3815 4651.46,3801.04 C10.1 4651.46,3653.54 4647.91,3650 C12.1 ; C2.1 4437.5,3385 4425,3397.5 C11.1 4461,3571 4525,3571 4551,3545 C12.1 ; C12.1 4647.91,3472.59 4662.5,3458 4747,3458 4812,3523 4888.5,3523 C4.1 C4.2 4951.5,3609 4982.6,3640.1 C13.1 ; C13.1 4982.6,3762.5 4996.1,3776 5293.53,3776 5294.53,3775 ; 5216.02,3885 5217.04,3884 ; 5217.04,3884 5294.53,3807.5 5294.53,3775 ; 5294.53,3775 R2.2 5294.53,3700.92 5371,3624.45 5371,3407.13 5387.5,3390.63 5485.83,3390.63 5673,3390.63 5878.58,3596.21 SW2.3 5933.5,3816.97 C1.1 5933.5,4333.5 6013,4413 6013,4529 6012,4530 C15.2
  Bottom Layer w6: v1(3027,4575) v1(2635,4575) 2804.84,4405.16 v1(3230.57,4405.16) 3229,4403.59 3229,4350 3243.43,4335.57 v1(3339.53,4335.57) ; v1(4772,4570) 4980,4570 v1(5034.53,4624.53) 5777.53,4624.53 5836,4683 5915,4683 ; v1(5740,4858) 5915,4683 ; v1(5985,4613) 5915,4683 ; v1(5985,4683) 5915,4683
NetAccelerometer_8: Accelerometer.8 C12.2 | length 960.6
  Top Layer w6: C12.2 4705,3652 4764,3711 4764,4454.47 4763,4455.47 Accelerometer.8
NetAccelerometer_20: Accelerometer.20 C15.1 | length 1493
  Top Layer w6: v1(4553,4515) 4553.47,4514.53 Accelerometer.20 ; v1(5854.15,4476.85) C15.1
  Bottom Layer w6: v1(4553,4515) 4564,4504 5541,4504 5560,4523 5808,4523 v1(5854.15,4476.85)
NetAccelerometer_23: Accelerometer.23 U1.63 | length 1079.6
  Top Layer w5.91: U1.63 v1(5267.05,4878)
  Top Layer w6: v1(4547.44,4455.47) Accelerometer.23
  Bottom Layer w6: v1(4547.44,4455.47) 4524.5,4478.42 4524.5,4556.5 4846,4878 v1(5267.05,4878)
NetAccelerometer_24: Accelerometer.24 U1.64 | length 1147.3
  Top Layer w5.91: U1.64 v1(5247.36,4896)
  Top Layer w6: v1(4512,4435.79) Accelerometer.24
  Bottom Layer w6: v1(4512,4435.79) 4512,4563 4845,4896 v1(5247.36,4896)
"NetBLE !RESET_1": "BLE !RESET.1" U.11 | length 505.6
  Top Layer w6: U.11 3257.31,3548.31 v1(3258,3549)
  Bottom Layer w6: v1(3258,3549) 3404,3403 3508,3403 3580,3475
NetC9_2: C9.2 U1.1 Y1.2 | length 1088.1
  Top Layer w5.91: 5015,4742.64 U1.1
  Top Layer w6: C9.2 4905,4009.21 Y1.2 4809.21,4536.85 5015,4742.64
NetC10_2: C10.2 U1.2 Y1.1 | length 2434.6
  Top Layer w5.91: 4854,4764 5209,4764 5210,4763 5210,4723.95 5209,4722.95 U1.2
  Top Layer w6: Y1.1 4710.79,3933.24 4708.54,3931 C10.2 4681,3760 4680,3759 4680,3643 4677,3640 4677,3516 4678,3515 4775,3515 4780,3520 4780,4466 4796,4482 4796,4706 4854,4764
NetC11_2: C11.2 R1.2 SW2.2 U1.52 | length 2654.9
  Top Layer w5.91: 5483.58,4760 U1.52
  Top Layer w6: v1(4230,3497) R1.2 ; v1(4487.99,3497) C11.2 ; 5483.58,4760 5560,4683.58 5560,4159.37 SW2.2
  Bottom Layer w6: v1(4230,3497) v1(4487.99,3497) 4900.99,3910 5593.47,3910 SW2.2
NetC14_1: "Charging Controller.6" "Charging Controller.13" C14.1 R3.2 USB.1 | length 4713.6
  Top Layer w4.92: 3212.5,4444.53 3254.88,4444.53 ; 3365.12,4405.16 3412.5,4405.16
  Top Layer w6: 3212.5,4444.53 3200,4432.03 3200,4253 3301.46,4151.54 v1(3301.46,3962) v1@3301.46,3961 ; C14.1 v1@3301.46,3961 ; 3412.5,4405.16 3594.74,4587.4 3594.74,4674 3593.52,4675.22 3546,4675.22 3545,4676.22 3545,4737 3706,4898 4538.18,4898 4561.18,4875 4561.18,4863.32 ; R3.2 3494.53,3975 3480.53,3961 v1@3301.46,3961 ; v1(3683.5,3962) 3759,4037.5 3759,4871 3775,4887 4537.5,4887 4561.18,4863.32 ; USB.1 4561.18,4863.32
  Bottom Layer w6: v1(3301.46,3962) v1(3683.5,3962)
NetC14_2: "Charging Controller.10" "Charging Controller.11" C14.2 | length 933.5
  Top Layer w4.92: 3287.5,4512.5 3319.84,4480.16 3319.84,4470.12
  Top Layer w6: 3287.5,4512.5 3242.5,4512.5 3188,4458 3188,3956 3259,3885 3357.54,3885 C14.2 ; 3300.16,4470.12 3319.84,4470.12
"NetCharging Controller_1": "Charging Controller.1" R4.1 | length 567.2
  Top Layer w4.92: 3280.47,4287.5 3280.47,4359.88
  Top Layer w6: 3280.47,4287.5 3296.97,4271 3520.14,4271 3670.47,4120.67 R4.1
"NetCharging Controller_5": "Charging Controller.5" R3.1 | length 882.3
  Top Layer w4.92: 3365.12,4385.47 3388.53,4385.47 v1(3389,4385)
  Top Layer w6: v1(3435.47,4046) R3.1
  Bottom Layer w6: v1(3389,4385) 3725,4385 3743,4367 3743,4337.5 3451.5,4046 v1(3435.47,4046)
"NetCharging Controller_7": "Charging Controller.7" D?.2 | length 319.5
  Top Layer w4.92: 3365.12,4424.84 3388.84,4424.84
  Top Layer w6: 3388.84,4424.84 v1(3406,4442) ; v1(3649.53,4442) D?.2
  Bottom Layer w6: v1(3406,4442) v1(3649.53,4442)
"NetCharging Controller_8": "Charging Controller.8" R4.2 USB.5 | length 2145.6
  Top Layer w4.92: 3365.12,4444.53 3372,4444.53 v1(3396.47,4469)
  Top Layer w6: R4.2 3729.53,4048.47 v1(3730,4048) ; v1(4007,4263) 4007,4624 4145.5,4762.5 4446.32,4762.5 4458.82,4775 USB.5
  Bottom Layer w6: v1(3396.47,4469) 3737.5,4469 3755,4451.5 3755,4073 v1(3730,4048) 3792,4048 v1(4007,4263)
"NetCharging Controller_9": "Charging Controller.9" DS?.1 | length 318.9
  Top Layer w4.92: 3339.53,4470.12 3339.53,4493.53 3496.48,4650.48
  Top Layer w6: 3496.48,4650.48 DS?.1
"NetCharging Controller_12": "Charging Controller.12" R5.1 | length 603.2
  Top Layer w4.92: 3280.47,4470.12 v1(3280.47,4494)
  Top Layer w6: R5.1 v1(2790.2,4494)
  Bottom Layer w6: v1(2790.2,4494) v1(3280.47,4494)
"NetCharging Controller_16": "Charging Controller.16" R?.2 | length 617.7
  Top Layer w4.92: 3221.43,4385.47 3254.88,4385.47
  Top Layer w6: 3221.43,4385.47 v1(3245.9,4361) ; R?.2 v1(3725.12,4343)
  Bottom Layer w6: v1(3245.9,4361) 3707.12,4361 v1(3725.12,4343)
NetL1_2: L1.2 U1.55 | length 995.5
  Top Layer w5.91: 5424.53,4737 U1.55
  Top Layer w6: L1.2 5343.98,4017.02 5232,4129 5232,4544.47 5424.53,4737
"NetQSPI Flash_1": "QSPI Flash.1" U1.24 | length 3145
  Top Layer w5.91: v1(5385,4329) 5385.16,4329.16 U1.24
  Top Layer w6: 2485,4630.51 v1(2485,4686)
  Bottom Layer w6: v1(2485,4686) 4058,4686 4415,4329 v1(5385,4329)
"NetQSPI Flash_2": "QSPI Flash.2"
"NetQSPI Flash_3": "QSPI Flash.3"
"NetQSPI Flash_5": "QSPI Flash.5"
"NetQSPI Flash_6": "QSPI Flash.6" U1.23 | length 3937.5
  Top Layer w5.91: U1.23 5365.47,4429 5512,4575.53
  Top Layer w6: 2585,4819.49 v1(2585,4874) ; 5512,4575.53 v1(5512,4664)
  Bottom Layer w6: v1(2585,4874) 2627,4916 4669,4916 4700,4947 5583,4947 5695,4835 5695,4684 5675,4664 v1(5512,4664)
"NetQSPI Flash_7": "QSPI Flash.7"
NetR2_1: R2.1 SW1.4 | length 799.2
  Top Layer w6: v1(5235.47,3657) R2.1
  Bottom Layer w6: v1(5235.47,3657) 5804.53,3657 SW1.4
NetR5_2: R5.2 R6.1 | length 296.2
  Top Layer w6: R5.2 2865,4600 2880,4615 R6.1
NetSW1_3: SW1.3 U1.40 | length 2010.7
  Top Layer w5.91: U1.40 5927.16,4585.16
  Top Layer w6: SW1.3 6025,3413.47 6025,4715.5 6012.5,4728 5943.5,4728 5928,4712.5 5928,4586 5927.16,4585.16
NetU1_35: U1.35 U.1 | length 3302
  Top Layer w5.91: U1.35 5658.27,4486.73 v1(5660,4485)
  Top Layer w6: U.1 v1(2789,3843.58)
  Bottom Layer w6: v1(2789,3843.58) 2837.42,3892 4421,3892 4806,4277 5452,4277 v1(5660,4485)
NetU1_36: U1.36 U.2 | length 3497.4
  Top Layer w5.91: U1.36 v1(5678,4506.42)
  Top Layer w6: U.2 v1(2760.53,3784.53)
  Bottom Layer w6: v1(2760.53,3784.53) 2854,3878 4458,3878 4606,4026 5414,4026 5678,4290 v1(5678,4506.42)
NetU1_43: U1.43 U.3 | length 5308.1
  Top Layer w5.91: U1.43 5660.79,4644.21 v1(5661,4644)
  Top Layer w6: v1(2614,3725) 2614.47,3725.47 U.3
  Bottom Layer w6: v1(2614,3725) 2871,3982 4059,3982 4380,4303 5387.5,4303 5402,4317.5 5402,4354.5 5387.5,4369 4659.5,4369 4536.5,4492 4536.5,4551.5 4629,4644 v1(5661,4644)
NetU1_44: U1.44 U.4 | length 3996.1
  Top Layer w5.91: U1.44 v1(5871,4663.9)
  Top Layer w6: U.4 v1(2716,3666.42)
  Bottom Layer w6: v1(2716,3666.42) 2875.58,3826 4492,3826 4680,4014 5435,4014 5871,4450 v1(5871,4663.9)
NetU1_45: U1.45 USB.2 | length 1363.4
  Top Layer w5.91: U1.45 v1(5661,4683.58)
  Top Layer w6: USB.2 4535.59,4783.41 v1(4547,4772)
  Bottom Layer w6: v1(4547,4772) 4695,4772 4837,4914 5430.58,4914 v1(5661,4683.58)
NetU1_46: U1.46 USB.3 | length 1389.7
  Top Layer w5.91: U1.46 v1(5678,4703.27)
  Top Layer w6: USB.3 v1(4510,4859)
  Bottom Layer w6: v1(4510,4859) 4543,4892 4729,4892 4769,4932 5449.27,4932 v1(5678,4703.27)
pads on no net: "Battery Terminal.MP1" "Battery Terminal.MP2" "Charging Controller.14" "Charging Controller.17" Accelerometer.2 Accelerometer.3 Accelerometer.4 Accelerometer.5 Accelerometer.6 Accelerometer.7 Accelerometer.10 Accelerometer.12 Accelerometer.14 Accelerometer.15 Accelerometer.16 Accelerometer.17 Accelerometer.19 Accelerometer.21 Accelerometer.22 Accelerometer.25 SW1.1 SW2.1 SW2.4 U1.3 U1.4 U1.5 U1.6 U1.9 U1.10 U1.11 U1.12 U1.13 U1.14 U1.15 U1.16 U1.17 U1.18 U1.19 U1.20 U1.25 U1.26 U1.27 U1.28 U1.29 U1.30 U1.31 U1.32 U1.37 U1.38 U1.39 U1.41 U1.42 U1.49 U1.50 U1.51 U1.57 U1.58 U1.59 U1.60 U1.61 U1.62 U.5 U.6 U.7 U.8 U.10 U.13 U.14 U.15 U.16 USB.4 USB.MH1 USB.MH2 USB.Shell
copper on no net:
  other v2: 4620.63,4445.63 4660,4445.63 4699.37,4445.63 4620.63,4485 4660,4485 4699.37,4485 4620.63,4524.37 4660,4524.37 4699.37,4524.37
  other v3: 3290.32,4395.32 3329.69,4395.32 3310,4415 3290.32,4434.69 3329.69,4434.69

## Text inside footprints (layer, text, board x,y; h text height)
USB: Top 3D Body "PCB Edge" at 4561.18,5064.92 h16 r180